# Altium PCB main.PcbDoc
Units mil, origin at the board's own origin, x right, y up, seen from the top; angles counter-clockwise.
Board outline 2106.16 x 2776.82 mil, 2 copper layers (Top Layer, Bottom Layer); 6 components, 31 nets, 74 pads, 0 vias.
Unrouted connection lines stored in the file: 3.
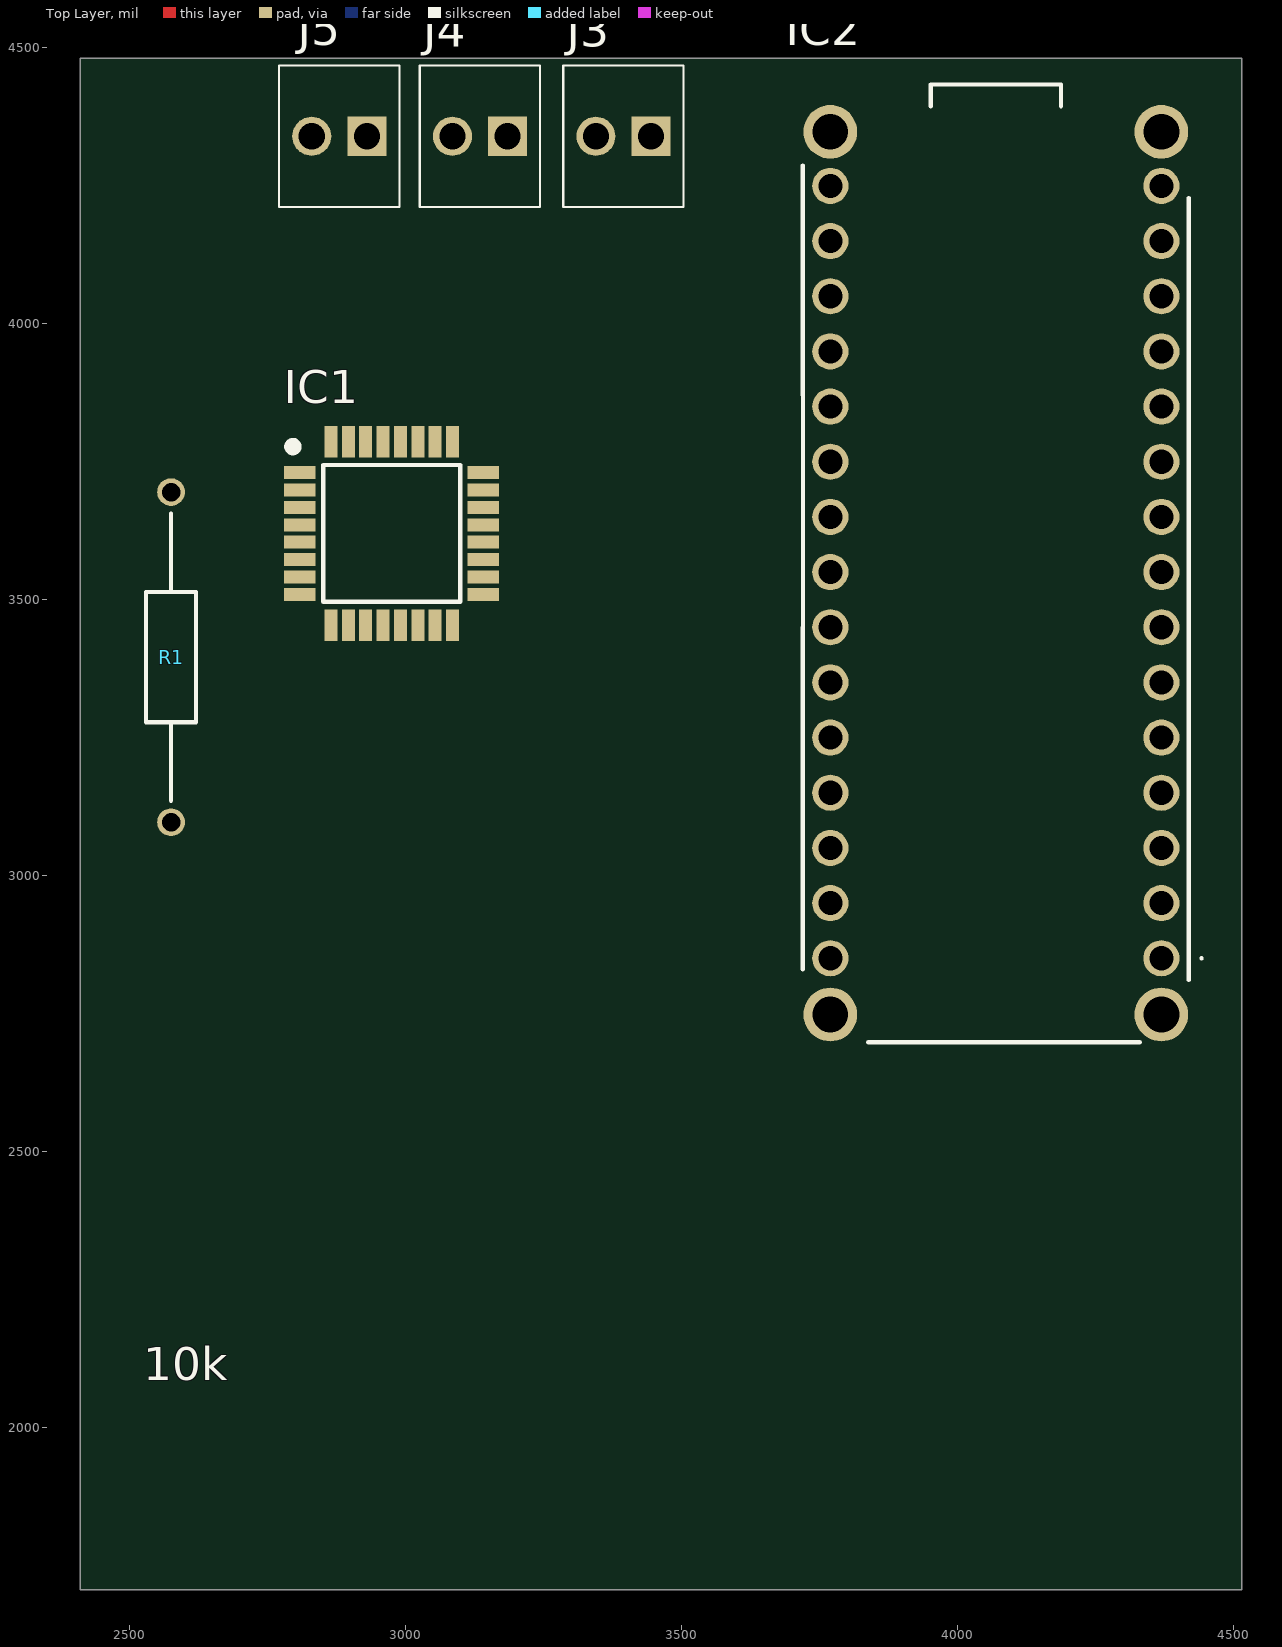
[diagram p0: Top Layer view]
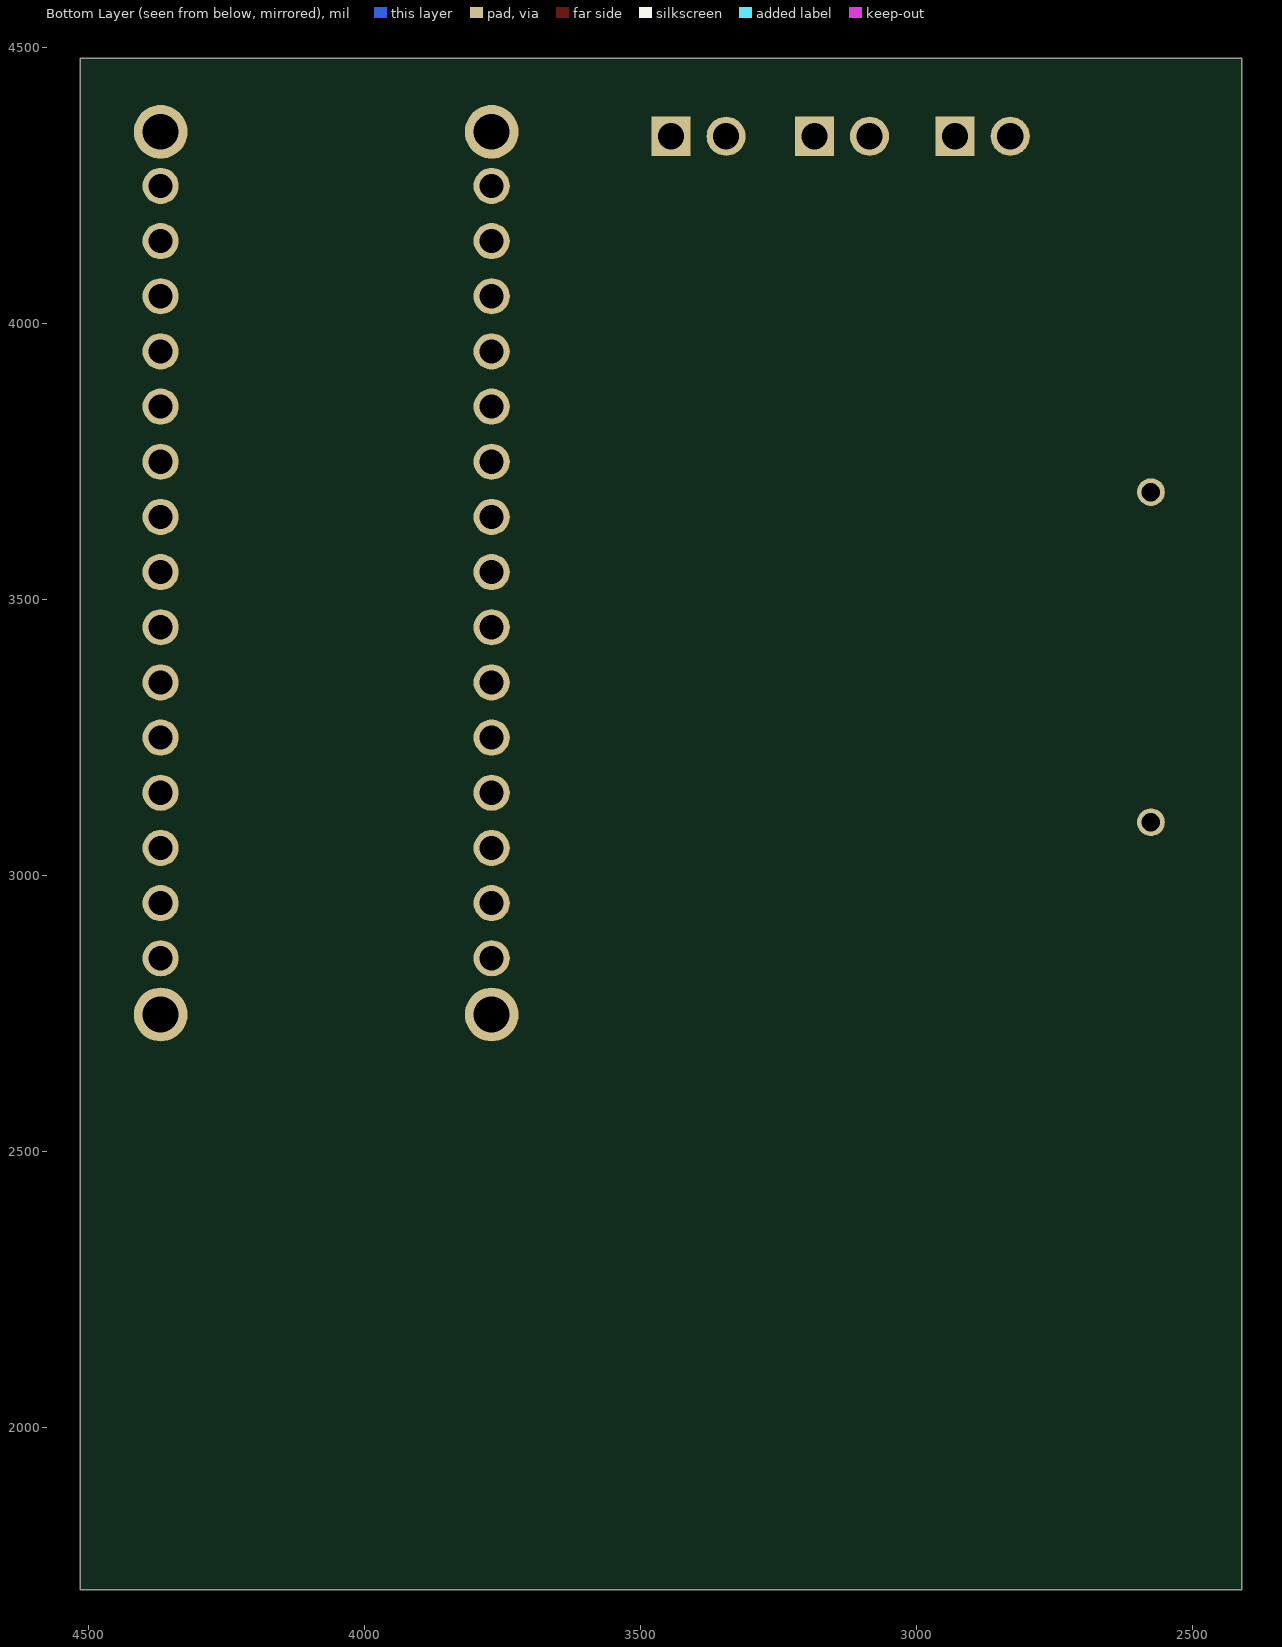
[diagram p1: Bottom Layer view, seen from below]

## Layer stack, top to bottom
Top Solder: solder mask 0.4, Solder Resist, Dk 3.5
Top Layer: signal copper 1.4
Dielectric 1: dielectric 12.6, FR-4, Dk 4.8
Bottom Layer: signal copper 1.4
Bottom Solder: solder mask 0.4, Solder Resist, Dk 3.5

## Board outline
4516.16,4481.82 2410,4481.82 2410,1705 4516.16,1705

## Design rules (kind name [scope] priority, off if disabled: settings)
Clearance [All] p1: gap=10 ignorepadtopadclearanceinfootprint=FALSE
PolygonConnect [All] p1: connectstyle=Relief reliefconductorwidth=10 reliefentries=4 polygonreliefangle="90 Angle" airgapwidth=10
RoutingVias [All] p1: holewidth=28 width=50 viastyle="Through Hole" minholewidth=28 minwidth=50 maxholewidth=28 maxwidth=50
SolderMaskExpansion [All] p1: expansion=4 istentingtop=FALSE
SupplyNets "Schematic Supply Nets" [InNet('GND')] p1: voltage=0.000
Width [All] p1: maxlimit=10 minlimit=10 preferedwidth=10
30 further rules are at their usual default settings.

## Components (designator, comment, footprint, x,y, rotation, side; value= is the part's Value field where it differs from the comment)
IC1 "C8051F314-GQ" QFP80P900X900X160-32N 2975,3620 r0 top
IC2 "ABX00053" ABX00053 4370,2850 r180 top
J3 "282834-2" 282834-2_1 3445,4340 r180 top
J4 "282834-2" 282834-2_1 3185,4340 r180 top
J5 "282834-2" 282834-2_1 2930,4340 r180 top
R1 "10k" RESAD1520W63L600D230 2575,3096.57 r90 top

## Footprints (in the part's own frame and the unit in brackets; to place one, negate y for a bottom-side part, rotate by r counter-clockwise, add the part's x,y. Pads: shape width x height; smd on the part's side, far side on the other; paste and mask are expansions set on the pad)
282834-2_1 [mm]
  rect 1.8x1.8 hole 1.2: 1(0,0)
  round 1.8 hole 1.2: 2(2.54,0)
  silkscreen extent -1.5,-3.25 4.04,3.25, body extent -1.5,-3.25 4.04,3.25, height 9.87
ABX00053 [mm]
  round 1.665 hole 1.11: 1(0,0) 2(0,-2.54) 3(0,-5.08) 4(0,-7.62) 5(0,-10.16) 6(0,-12.7) 7(0,-15.24) 8(0,-17.78) 9(0,-20.32) 10(0,-22.86) 11(0,-25.4) 12(0,-27.94) 13(0,-30.48) 14(0,-33.02) 15(0,-35.56) 16(15.24,-35.56) 17(15.24,-33.02) 18(15.24,-30.48) 19(15.24,-27.94) 20(15.24,-25.4) 21(15.24,-22.86) 22(15.24,-20.32) 23(15.24,-17.78) 24(15.24,-15.24) 25(15.24,-12.7) 26(15.24,-10.16) 27(15.24,-7.62) 28(15.24,-5.08) 29(15.24,-2.54) 30(15.24,0)
  round 2.475 hole 1.65: MH1(0,2.59) MH2(15.24,2.59) MH3(0,-38.05) MH4(15.24,-38.05)
  silkscreen extent -1.9,-40.23 16.5,3.86, body extent -1.26,-40.72 16.5,3.86, height 8.09
QFP80P900X900X160-32N [mm]
  rect 1.45x0.6 smd: 1(-4.225,2.8) 2(-4.225,2) 3(-4.225,1.2) 4(-4.225,0.4) 5(-4.225,-0.4) 6(-4.225,-1.2) 7(-4.225,-2) 8(-4.225,-2.8) 17(4.225,-2.8) 18(4.225,-2) 19(4.225,-1.2) 20(4.225,-0.4) 21(4.225,0.4) 22(4.225,1.2) 23(4.225,2) 24(4.225,2.8)
  rect 0.6x1.45 smd: 9(-2.8,-4.225) 10(-2,-4.225) 11(-1.2,-4.225) 12(-0.4,-4.225) 13(0.4,-4.225) 14(1.2,-4.225) 15(2,-4.225) 16(2.8,-4.225) 25(2.8,4.225) 26(2,4.225) 27(1.2,4.225) 28(0.4,4.225) 29(-0.4,4.225) 30(-1.2,4.225) 31(-2,4.225) 32(-2.8,4.225)
  silkscreen extent -4.75,-3.15 3.15,4.2, body extent -4.5,-4.5 4.5,4.5, height 1.6
RESAD1520W63L600D230 [mm]
  round 1.275 hole 0.85: 1(0,0) 2(15.2,0)
  silkscreen extent 0.99,-1.15 14.21,1.15, body extent -23.4,-1.15 38.6,1.15, height 2.29

## Part data
IC1: "Integrated Circuit", Manufacturer_Name="Silicon Labs", Mouser Part Number=634-C8051F314-GQ, Arrow Part Number=C8051F314-GQ, Arrow Price/Stock=https://www.arrow.com/en/products/c8051f314-gq/silicon-labs?utm_currency=USD&region=europe, Datasheet Link=https://www.silabs.com/documents/public/data-sheets/C8051F31x.pdf, Height=1.6mm, Manufacturer_Part_Number=C8051F314-GQ, Mouser Price/Stock=https://www.mouser.co.uk/ProductDetail/Silicon-Labs/C8051F314-GQ?qs=vyiwtxxqSmTKpdLyYs0rcg%3D%3D
IC2: "Integrated Circuit", Manufacturer_Name=Arduino, Mouser Part Number=782-ABX00053, Arrow Part Number=ABX00053, Arrow Price/Stock=https://www.arrow.com/en/products/abx00053/arduino-corporation?utm_currency=USD&region=nac, Datasheet Link=https://content.arduino.cc/assets/ABX00053-datasheet.pdf, Height=3.25mm, Manufacturer_Part_Number=ABX00053, Mouser Price/Stock=https://www.mouser.co.uk/ProductDetail/Arduino/ABX00053?qs=iLbezkQI%252Bsj092HEuR%252Bsvg%3D%3D
J3 J4 J5: "Connector", Manufacturer_Name="TE Connectivity", Mouser Part Number=571-282834-2, Arrow Part Number=282834-2, Arrow Price/Stock=https://www.arrow.com/en/products/282834-2/te-connectivity?utm_currency=USD&region=europe, Datasheet Link=https://www.te.com/commerce/DocumentDelivery/DDEController?Action=srchrtrv&DocNm=1-1773458-1_EURO_STYLE_QRG&DocType=Data%20Sheet&DocLang=English&PartCntxt=282834-2&DocFormat=pdf, Manufacturer_Part_Number=282834-2, Mouser Price/Stock=https://www.mouser.co.uk/ProductDetail/TE-Connectivity/282834-2?qs=A%252Bip%252BNCYi6N8cVKuk8xDog%3D%3D
R1: library part CF14JT1K00, "Resistor", Manufacturer_Name="Stackpole Electronics", Mouser Part Number=708-CF14JT1K00, Arrow Part Number=CF14JT1K00, Arrow Price/Stock=https://www.arrow.com/en/products/cf14jt1k00/stackpole-electronics?region=nac, Datasheet Link=https://cs.seielect.com/catalog/SEI-CF_CFM.pdf, Manufacturer_Part_Number=CF14JT1K00, Mouser Price/Stock=https://www.mouser.co.uk/ProductDetail/SEI-Stackpole/CF14JT1K00?qs=FESYatJ8odLLAkjsom%2FJYQ%3D%3D

## Nets (pads, with @x,y where several pads share a name; then routed paths per layer and width w, separated by ;. In a path a pad name is that pad's centre, name@x,y a point inside that pad or via, vN(x,y) a via of type N, cw(c..) or ccw(c..) an arc to the next point about the centre after c; other vN are vias at no path point)
/RST: IC1.7
/SS: IC1.17
APE/IP: IC1.32 J3.1
CF: IC1.26
CM: IC1.11
DIAHD: IC1.6
DIAHG: IC1.4
GND: IC1.29 R1.2
GNDS: IC1.28
H+: J5.1
H-/GND: J5.2
IA: IC1.2
IPN/VM: IC1.20 J3.2
OSZ: IC1.3
RF: IC1.27
RM: IC1.10
RS: IC1.8
RT/IA: J4.1
SCK: IC1.13
SI: IC1.15
SO: IC1.14
UA: IC1.23
UB: IC1.30
UN: IC1.31
UN/RE: J4.2
UP: IC1.22
UR: IC1.12
US: IC1.21
VCC: IC1.19
VCCS: IC1.5
VCCSS: IC1.18
pads on no net: IC1.1 IC1.9 IC1.16 IC1.24 IC1.25 IC2.1 IC2.2 IC2.3 IC2.4 IC2.5 IC2.6 IC2.7 IC2.8 IC2.9 IC2.10 IC2.11 IC2.12 IC2.13 IC2.14 IC2.15 IC2.16 IC2.17 IC2.18 IC2.19 IC2.20 IC2.21 IC2.22 IC2.23 IC2.24 IC2.25 IC2.26 IC2.27 IC2.28 IC2.29 IC2.30 IC2.MH1 IC2.MH2 IC2.MH3 IC2.MH4 R1.1